# EAGLE board arduinoISP (EAGLE 9.1.2)
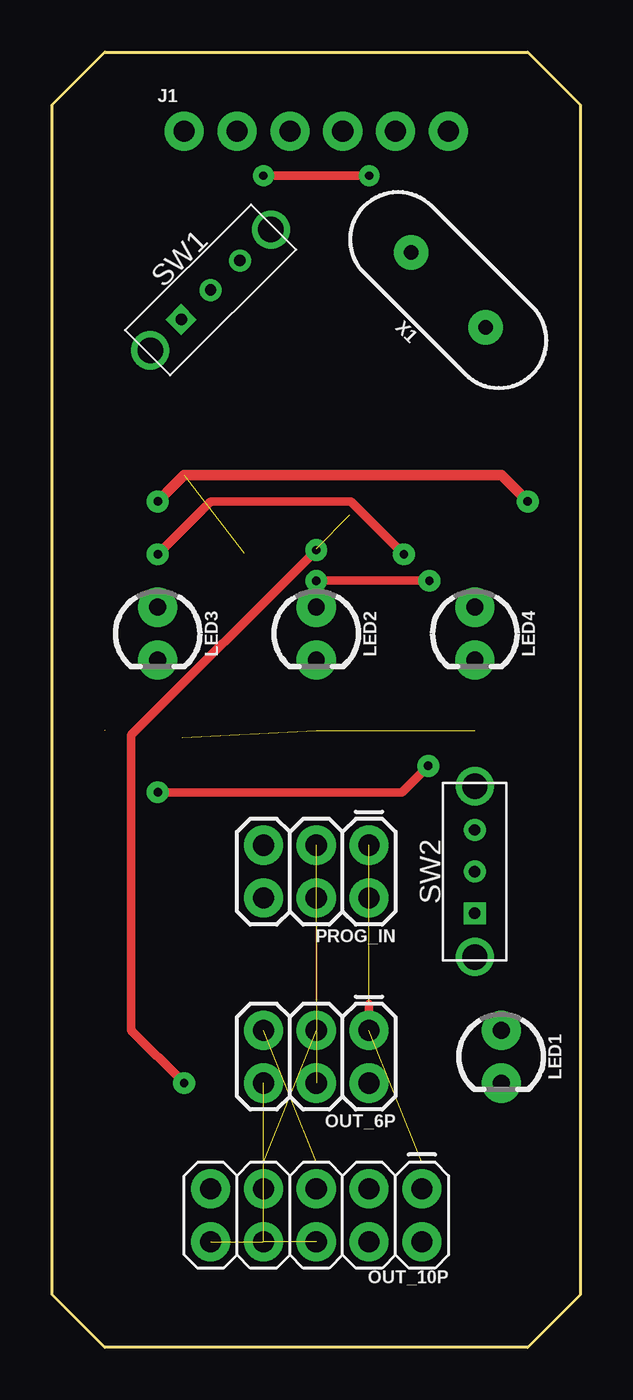
[diagram p0: board, top side]
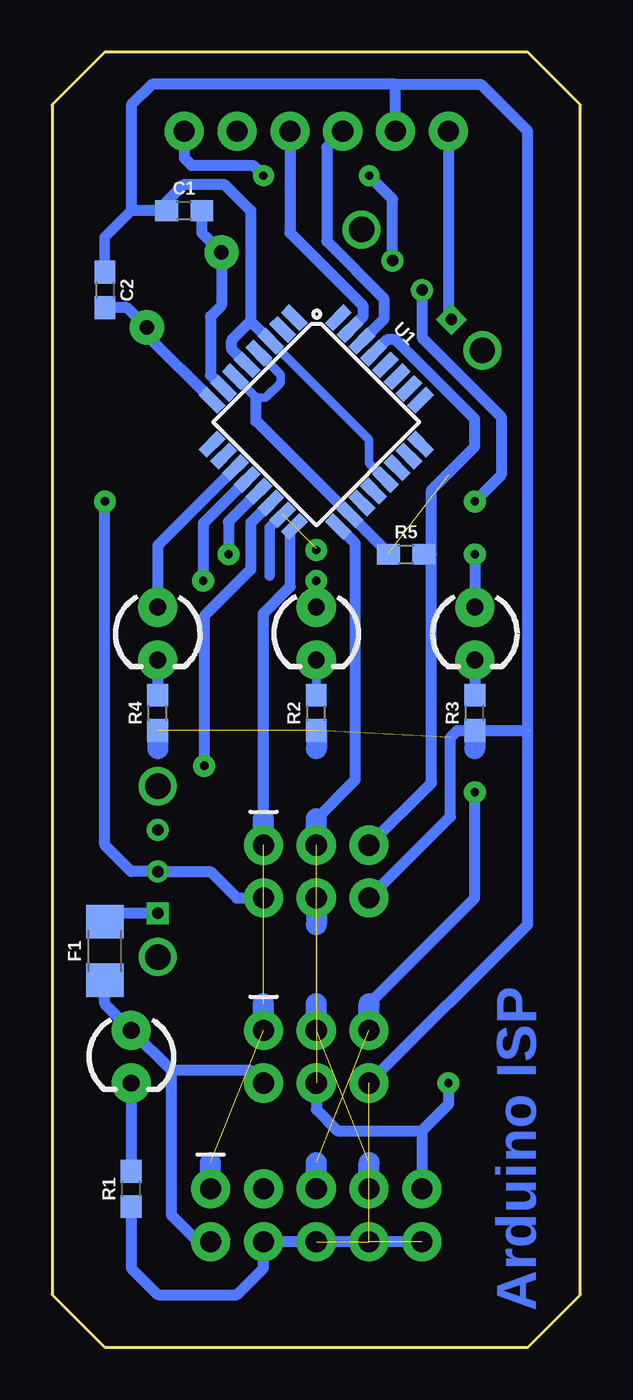
[diagram p1: board, bottom side, seen from below]

Size 25.4 x 62.23 mm. Coordinates in mm from the lower left corner, seen from the top.
Outline: 2.54,0 0,2.54 0,59.69 2.54,62.23 22.86,62.23 25.4,59.69 25.4,2.54 22.86,0 2.54,0
Copper layers (1*16): Top 0.035mm / dielectric 1.5mm / Bottom 0.035mm
Design rules "default *": minimum track width 6mil, minimum drill 0.35mm, track to track 10mil, track to pad 10mil, pad to pad 6mil, via to via 10mil, smd to smd 10mil, copper to edge 40mil, drill to drill 6mil, minimum pad ring 10mil, minimum via ring 8mil, stop-mask expansion 4mil, vias tented up to drill 0mil, thermal gap 10mil

## Footprints (pad centres in the part's own frame; a part is rotated, then mirrored left to right if it is on the bottom)
0603 = smd 1.1 x 1: 1 -0.85,0; 2 0.85,0
1206 = smd 1.6 x 1.8: 1 -1.4,0; 2 1.4,0
1X06_NO_SILK = drill 1.016 pad 1.88: 1 0,0; 2 2.54,0; 3 5.08,0; 4 7.62,0; 5 10.16,0; 6 12.7,0
LED_3MM = drill 0.813 pad 1.88: A -1.27,0; K 1.27,0
2X3 = drill 1.016 pad 1.88: 1 0,0; 2 0,2.54; 3 2.54,0; 4 2.54,2.54; 5 5.08,0; 6 5.08,2.54
2X5 = drill 1.016 pad 1.88: 1 0,0; 2 0,2.54; 3 2.54,0; 4 2.54,2.54; 5 5.08,0; 6 5.08,2.54; 7 7.62,0; 8 7.62,2.54; 9 10.16,0; 10 10.16,2.54
SW_SS-12D10L5_FP = drill 0.55 pad 1.016 square: P$1 -2,0 | drill 0.55 pad 1.016: P$2 0,0; P$3 2,0 | drill 1.219 pad 1.778: P$4 -4.102,0; P$5 4.102,0
TQFP32-08 = smd 1.27 x 0.559: 1 -4.293,2.8; 2 -4.293,2; 3 -4.293,1.2; 4 -4.293,0.4; 5 -4.293,-0.4; 6 -4.293,-1.2; 7 -4.293,-2; 8 -4.293,-2.8; 17 4.293,-2.8; 18 4.293,-2; 19 4.293,-1.2; 20 4.293,-0.4; 21 4.293,0.4; 22 4.293,1.2; 23 4.293,2; 24 4.293,2.8 | smd 0.559 x 1.27: 9 -2.8,-4.293; 10 -2,-4.293; 11 -1.2,-4.293; 12 -0.4,-4.293; 13 0.4,-4.293; 14 1.2,-4.293; 15 2,-4.293; 16 2.8,-4.293; 25 2.8,4.293; 26 2,4.293; 27 1.2,4.293; 28 0.4,4.293; 29 -0.4,4.293; 30 -1.2,4.293; 31 -2,4.293; 32 -2.8,4.293
HC49US = drill 0.7 pad 1.651: 1 -2.54,0; 2 2.54,0

## Placement (x,y rotation side)
C1  20pF  [0603]  19.05,54.61 0 bottom
C2  20pF  [0603]  22.86,50.8 270 bottom
F1  6V/0.5A  [1206]  22.86,19.05 90 bottom
J1  [1X06_NO_SILK]  6.35,58.42 0 top
LED1  [LED_3MM]  21.59,13.97 270 top
LED2  ERR  [LED_3MM]  12.7,34.29 270 top
LED3  HB  [LED_3MM]  5.08,34.29 270 top
LED4  PMODE  [LED_3MM]  20.32,34.29 270 top
OUT_6P  AVR_SPI_PROG_3X2PTH  [2X3]  15.24,15.24 180 top
OUT_10P  AVR_SPI_PROG_5X2PTH  [2X5]  17.78,7.62 180 top
PROG_IN  AVR_SPI_PROG_3X2PTH  [2X3]  15.24,24.13 180 top
R1  470  [0603]  21.59,7.62 90 bottom
R2  470  [0603]  12.7,30.48 90 bottom
R3  470  [0603]  5.08,30.48 90 bottom
R4  470  [0603]  20.32,30.48 90 bottom
R5  10k  [0603]  8.38,38.1 0 bottom
SW1  SW-SPDT_SS-12D02-VG4  [SW_SS-12D10L5_FP]  7.62,50.8 45 top
SW2  SW-SPDT_SS-12D02-VG4  [SW_SS-12D10L5_FP]  20.32,22.86 90 top
U1  ATMEGA328P_TQFP  [TQFP32-08]  12.7,44.45 315 bottom
X1  16MHz  [HC49US]  19.05,50.8 135 top

## Library data of the parts
C1 C2 R1-R5 = myLib-Passive
F1 = SparkFun-Fuses; PROD_ID: RES-08585
J1 OUT_6P OUT_10P PROG_IN = SparkFun-Connectors
LED1-LED4 = SparkFun-LED; PROD_ID: DIO-08794
SW1 SW2 = myLib-SwitchesAndRelays
U1 = SparkFun-IC-Microcontroller; PROD_ID: IC-09069
X1 = SparkFun-Clocks; PROD_ID: XTAL-08181; SF_ID: COM-00536

## Nets
!RST!-IN: PROG_IN.5 R5.2 U1.29
!RST!-OUT: OUT_6P.5 OUT_10P.5 U1.14
DGND: C1.1 C2.1 J1.2 OUT_6P.6 OUT_10P.4 OUT_10P.6 OUT_10P.8 OUT_10P.10 PROG_IN.6 R1.1 R2.1 R3.1 R4.1 U1.3 U1.5 U1.21
DTR: J1.5
MISO: OUT_6P.1 OUT_10P.1 PROG_IN.1 U1.16
MOSI: OUT_6P.4 OUT_10P.9 PROG_IN.4 U1.15
N$1: LED1.K R1.2
N$2: LED2.K R2.2
N$3: LED2.A U1.12
N$4: LED3.K R3.2
N$5: LED4.K R4.2
N$6: LED3.A U1.13
N$7: LED4.A U1.11
N$8: C1.2 U1.7 X1.2
N$9: C2.2 U1.8 X1.1
N$10: F1.2 SW2.P$1
P3V3: J1.6 SW1.P$3
P5V: J1.1 SW1.P$1
RX: J1.4 U1.31
SCK: OUT_6P.3 OUT_10P.7 PROG_IN.3 U1.17
TX: J1.3 U1.30
VCC: PROG_IN.2 R5.1 SW1.P$2 SW2.P$2 U1.4 U1.6 U1.18
VCC1: F1.1 LED1.A OUT_6P.2 OUT_10P.2

## Tracks (layer width: path | path; a pad name or v marks a point on that pad's centre or on a via)
!RST!-IN
  Bottom 0.406: R5.2 7.16,38.1
  Bottom 0.533: PROG_IN.5 7.16,27.13 7.16,38.1 7.16,41.2 5.08,43.28 5.08,44.6 8.89,48.41 9.3,48.41 U1.29
!RST!-OUT  (via drill 0.4 pad 1.05)  (1 unrouted)
  Top 0.406: v5.08,26.67 16.82,26.67 v18.09,27.94
  Bottom 0.533: v18.09,27.94 18.09,35.13 15.85,37.36 15.85,39.6 U1.14 | 10.16,16.51 5.08,21.59 v5.08,26.67
  Bottom 1.016: OUT_10P.5 12.7,8.89 | OUT_6P.5 10.16,16.51
DGND  (6 unrouted)
  Bottom 0.406: C1.1 19.9,55.03 | U1.3 10.16,43.61 10.16,42.48 U1.21
  Bottom 0.508: 21.59,54.61 22.86,53.34 C2.1
  Bottom 0.533: J1.2 8.89,60.68 | 8.89,60.68 20.6,60.68 21.59,59.69 21.59,54.61 C1.1 | 19.9,55.03 19.05,55.88 17.12,55.88 15.85,54.61 15.85,49.53 15.85,49.3 | 15.85,49.3 U1.3 | U1.5 16.76,47.95 16.76,48.38 15.85,49.3 | 8.89,60.68 4.8,60.68 2.54,58.42 2.54,29.63 R3.1 5.93,29.63 6.25,29.31 6.25,25.5 PROG_IN.6 | R1.1 21.59,3.81 20.32,2.54 16.51,2.54 15.24,3.81 OUT_10P.4 OUT_10P.10 | OUT_6P.6 2.54,20.32 2.54,29.67
  Bottom 1.016: R4.1 20.32,28.75 | R2.1 12.7,28.75 | R3.1 5.08,28.75
MISO  (2 unrouted)
  Top 0.406: 15.24,16.51 OUT_6P.1
  Bottom 0.508: 13.95,36.55 13.95,39.24 U1.16
  Bottom 0.533: 13.95,36.55 15.24,35.26 15.24,25.4
  Bottom 1.016: PROG_IN.1 15.24,25.4 | OUT_6P.1 15.24,16.51 | OUT_10P.1 17.78,8.89
MOSI  (via drill 0.4 pad 1.05)  (2 unrouted)
  Top 0.406: v12.7,38.3 3.81,29.41 3.81,15.24 v6.35,12.7
  Bottom 0.406: 12.7,38.38 v12.7,38.3
  Bottom 0.508: U1.15 14.94,39.39 14.94,37.08
  Bottom 0.533: OUT_10P.9 7.62,10.16 7.62,10.41 | v6.35,12.7 6.35,11.68 7.62,10.41 | OUT_6P.4 12.7,11.43 11.68,10.41 7.62,10.41
  Bottom 1.016: PROG_IN.4 12.7,20.32
N$1
  Bottom 0.533: LED1.K R1.2
N$2
  Bottom 0.406: LED2.K R2.2
N$3  (via drill 0.4 pad 1.05)
  Top 0.406: v18.14,36.83 v12.7,36.83
  Bottom 0.406: v12.7,36.83 LED2.A
  Bottom 0.533: U1.12 18.14,39.58 v18.14,36.83
N$4
  Bottom 0.533: LED3.K R3.2
N$5
  Bottom 0.533: LED4.K R4.2
N$6  (via drill 0.4 pad 1.05)
  Top 0.406: v16.92,38.1 14.81,40.21 14.38,40.64 7.62,40.64 v5.08,38.1
  Bottom 0.533: U1.13 16.92,39.67 v16.92,38.1 | v5.08,38.1 LED3.A
N$7
  Bottom 0.533: U1.11 20.32,38.53 LED4.A
N$8
  Bottom 0.533: C1.2 18.2,53.54 X1.2 17.25,50.06 17.78,49.53 17.78,46.7 U1.7
N$9
  Bottom 0.533: C2.2 21.79,49.95 X1.1 20.85,48.64 U1.8
N$10
  Bottom 0.508: 22.45,20.86 F1.2
  Bottom 0.533: SW2.P$1 22.45,20.86
P3V3  (via drill 0.4 pad 1)
  Top 0.406: v10.16,56.29 v15.24,56.29
  Bottom 0.533: J1.6 19.05,57.15 18.69,56.79 15.75,56.79 v15.24,56.29 | SW1.P$3 9.03,55.16 v10.16,56.29
P5V
  Bottom 0.406: 6.35,49.53 SW1.P$1
  Bottom 0.533: J1.1 6.35,49.53
RX
  Bottom 0.533: J1.4 13.97,53.54 10.46,50.04 10.46,49.51 U1.31
SCK  (2 unrouted)
  Bottom 0.533: 12.7,25.4 10.82,27.28 10.82,38.61 U1.17
  Bottom 1.016: PROG_IN.3 12.7,25.4 | OUT_10P.7 10.16,8.89 | OUT_6P.3 12.7,16.51
TX
  Bottom 0.533: J1.3 12.19,57.66 12.19,53.14 9.45,50.39 9.45,49.4 U1.30
VCC  (via drill 0.4 pad 1.05)  (1 unrouted)
  Top 0.508: v5.08,40.64 6.35,41.91 21.59,41.91 v22.86,40.64
  Bottom 0.406: U1.4 14.43,46.74 14.43,46.33 15.14,45.62 15.6,45.62 16.58,46.61 U1.6 | 15.66,44.45 15.6,44.52 | R5.1 9.23,38.15
  Bottom 0.533: 15.6,45.62 15.6,44.52 U1.18 9.23,38.15 | SW1.P$2 7.62,48.51 3.81,44.7 3.81,41.91 v5.08,40.64 | v22.86,40.64 22.86,24.13 21.59,22.86 SW2.P$2 17.78,22.86 16.51,21.59 PROG_IN.2
VCC1
  Bottom 0.533: 19.66,13.31 LED1.A 22.86,16.51 F1.1 | OUT_6P.2 15.85,13.31 19.66,13.31 | OUT_10P.2 18.39,5.08 19.66,6.35 19.66,13.31

## Text on the board
Bottom: Arduino ISP